# Altium PCB HP8555A_A9.PcbDoc
Units mm, origin at the board's own origin, x right, y up, seen from the top; angles counter-clockwise.
Board outline 68 x 60 mm, 2 copper layers (Top Layer, Bottom Layer), stack 0.981 mm thick; 23 components, 14 nets, 53 pads, 64 vias.
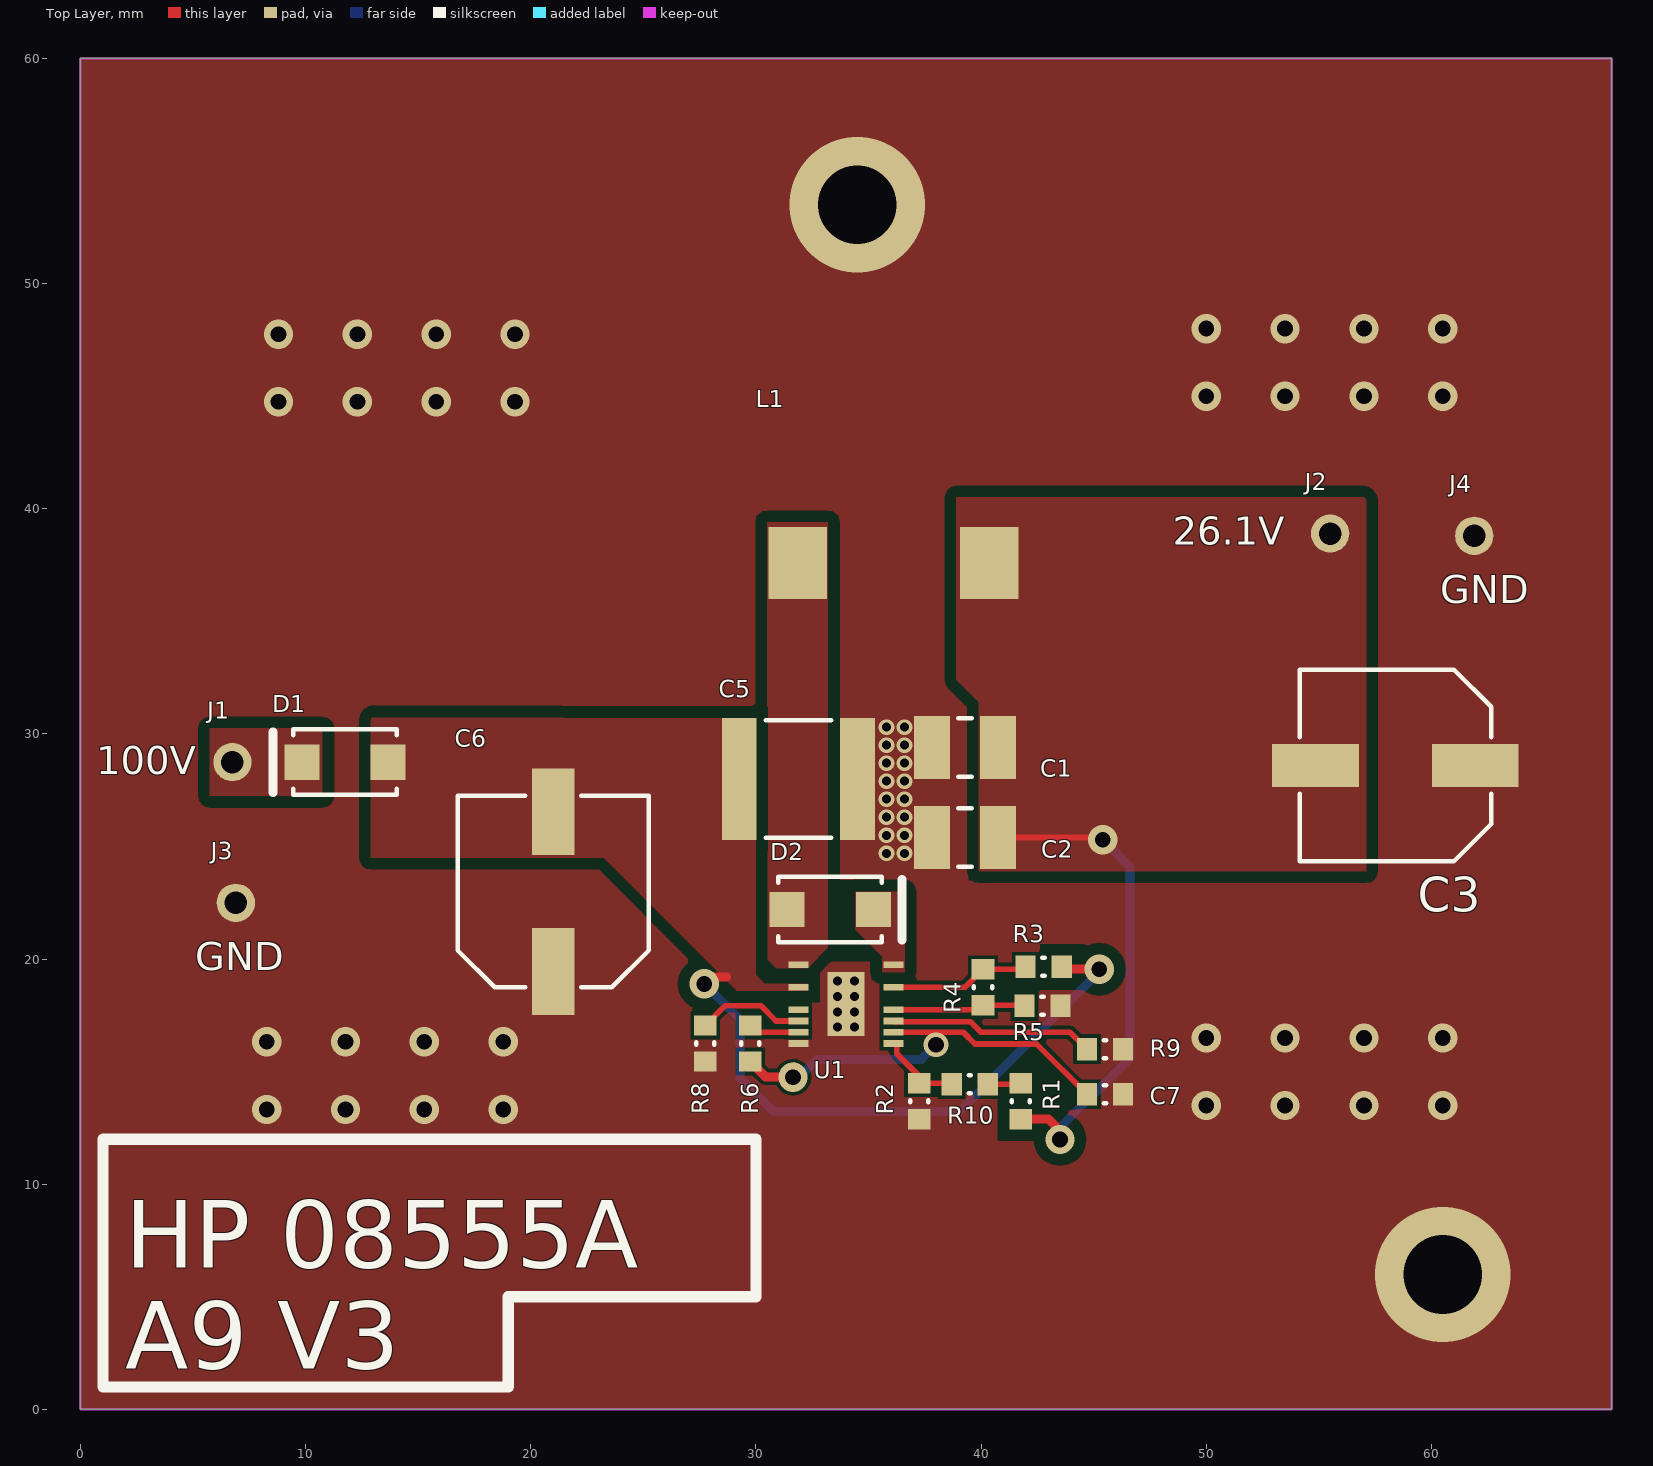
[diagram p0: Top Layer view]
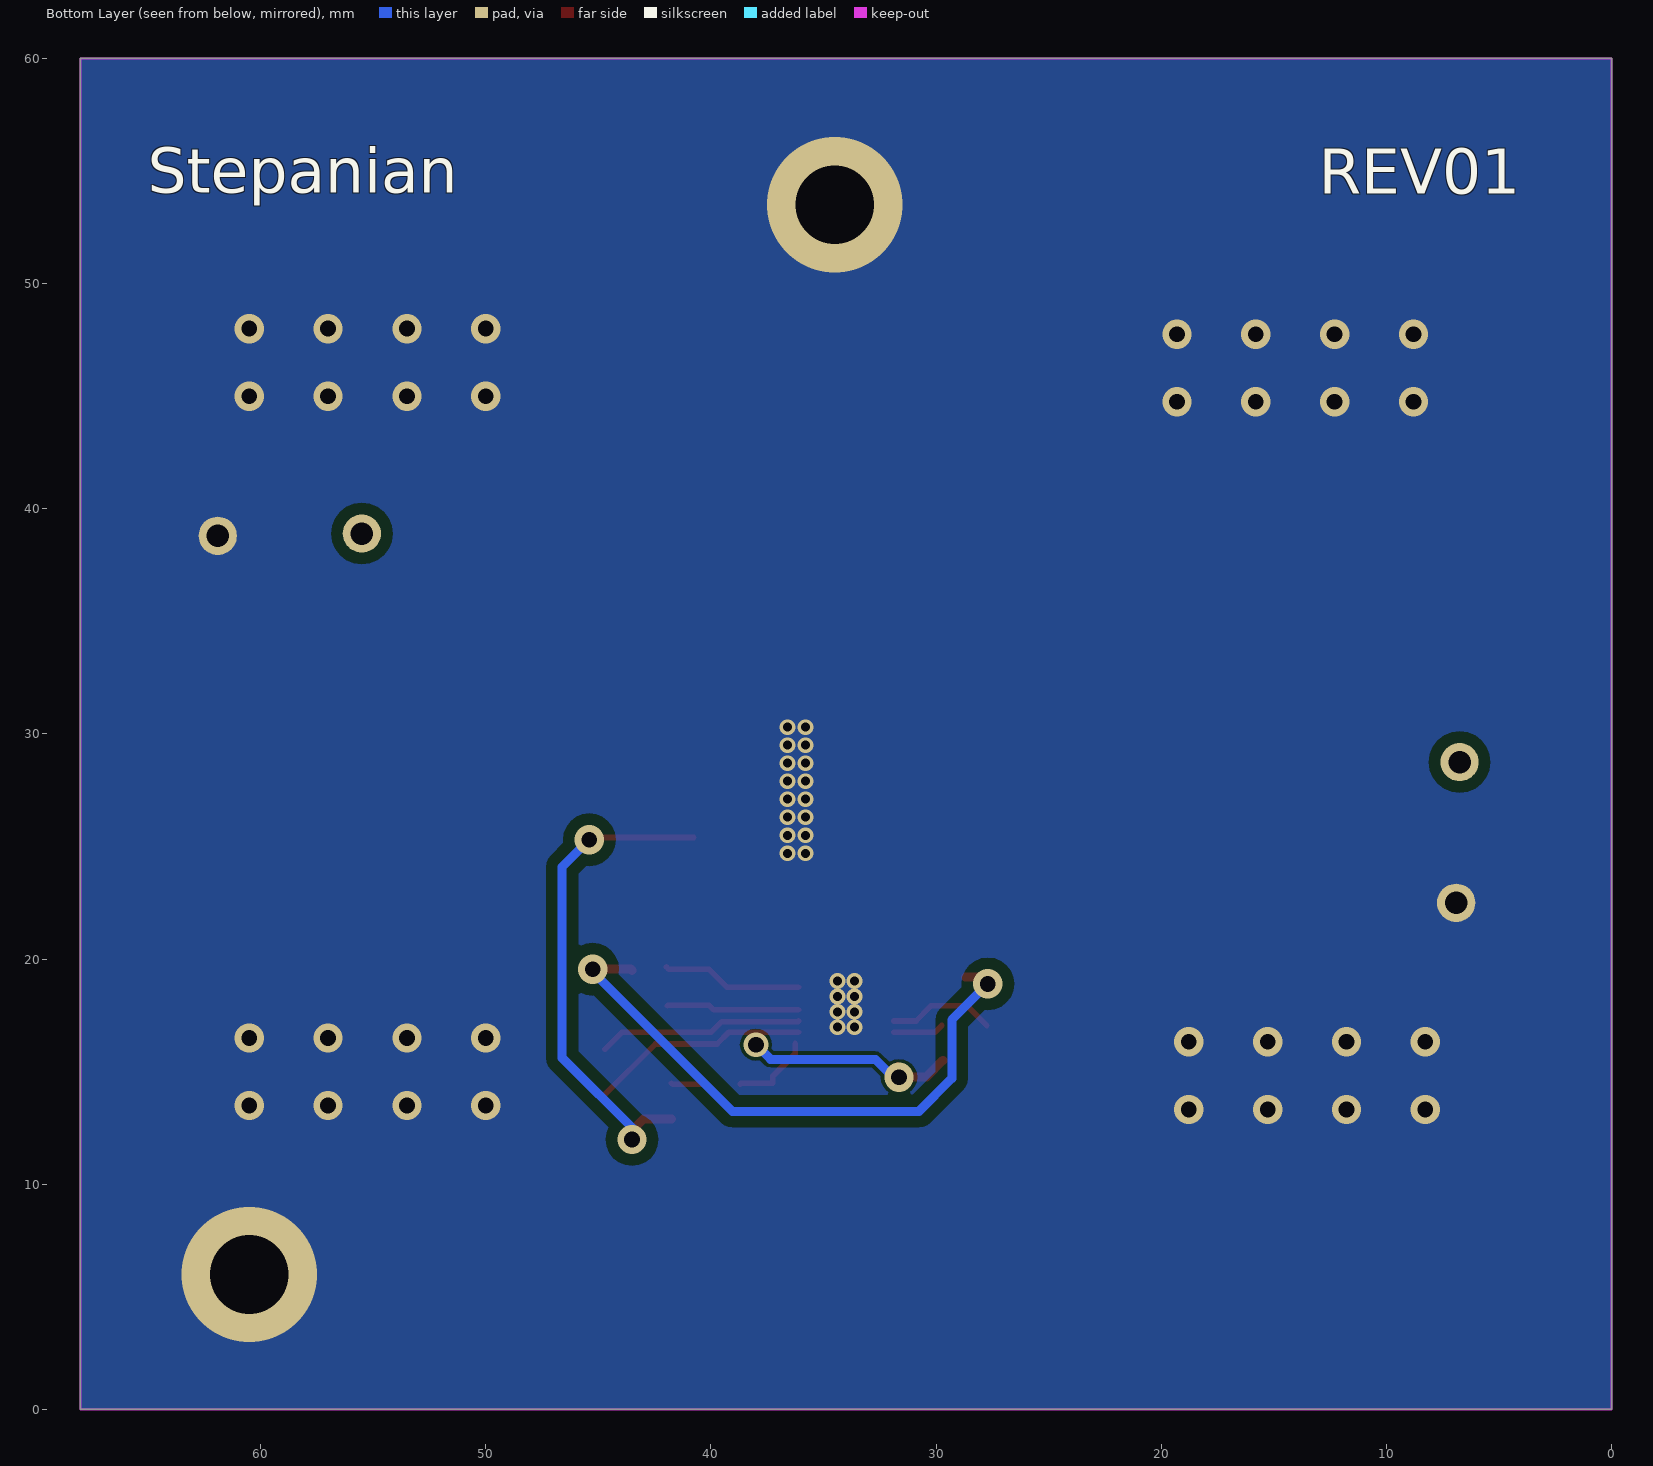
[diagram p1: Bottom Layer view, seen from below]

## Layer stack, top to bottom
Top Solder: solder mask 0.0102, Solder Resist, Dk 3.5
Top Layer: signal copper 0.0356
Dielectric 1: dielectric 0.91, FR-4, Dk 4.8
Bottom Layer: signal copper 0.0356
Bottom Solder: solder mask 0.0102, Solder Resist, Dk 3.5

## Board outline
0,0 68,0 68,60 0,60

## Design rules (kind name [scope] priority, off if disabled: settings)
Clearance Clearance_HV [InNetClass('HV')] p1: gap=0.508 ignorepadtopadclearanceinfootprint=FALSE
Clearance [All] p2: gap=0.152 ignorepadtopadclearanceinfootprint=FALSE
HoleSize [All] p1: absolutevalues=TRUE maxlimit=5 minlimit=0.3 maxpercent=80.000 minpercent=20.000
MinimumSolderMaskSliver [All] p1: minsoldermaskwidth=0.2
PlaneConnect [All] p1: planeconnectstyle=Direct reliefexpansion=0.508 reliefentries=4 reliefconductorwidth=0.254 reliefairgap=0.254
PolygonConnect [All] p1: connectstyle=Direct reliefconductorwidth=0.254 reliefentries=4 polygonreliefangle="90 Angle" airgapwidth=0.254
RoutingVias [All] p1: holewidth=0.711 width=1.27 viastyle="Through Hole" minholewidth=0.4 minwidth=0.7 maxholewidth=0.711 maxwidth=1.27
SilkToSilkClearance [All] p1 off: silktosilkclearance=0.254
SilkToSolderMaskClearance [IsPad] p1 off: minsilkscreentomaskgap=0.254 clearancetoexposedcopper=TRUE
SolderMaskExpansion [All] p1: expansion=0.15
Width [All] p1: maxlimit=0.508 minlimit=0.127 preferedwidth=0.254
25 further rules are at their usual default settings.

## Classes and differential pairs
net class HV: ANODE NetD1_2 SW VIN VOUT

## Components (designator, comment, footprint, x,y, rotation, side; value= is the part's Value field where it differs from the comment)
C1 "22u" CAP_1210_M 39.284,29.4 r0 top
C2 "OPT" CAP_1210_M 39.284,25.4 r0 top
C3 "OPT" CAP_ALU_GEN 58.4,28.6 r180 top
C5 "22u" CAP_2220_M 31.884,28 r180 top
C6 "OPT" CAP_ALU_GEN 21,23 r90 top
C7 "100n" CAP_0603_M 45.5,14 r180 top
D1 "ES1D" ES1D 11.75,28.75 r180 top
D2 "ES1D" ES1D 33.3,22.2 r0 top
J1 "Pin Header" PIN_HEADER_1POS 6.75,28.75 r0 top
J2 "Pin Header" PIN_HEADER_1POS 55.5,38.9 r0 top
J3 "Pin Header" PIN_HEADER_1POS 6.9,22.5 r0 top
J4 "Pin Header" PIN_HEADER_1POS 61.9,38.8 r0 top
L1 "470u" TDK_SLF12555T 36.105,37.6 r0 top
R1 "200K" RES_0603_M 41.75,13.69 r270 top
R2 "51K" RES_0603_M 37.25,13.69 r90 top
R3 "200K" RES_0603_M 42.776,19.653 r0 top
R4 "500R" RES_0603_M 40.084,18.75 r90 top
R5 "2.2K" RES_0603_M 42.726,17.926 r180 top
R6 "0R" RES_0603_M 29.75,16.25 r270 top
R8 "0R" RES_0603_M 27.75,16.25 r270 top
R9 "OPT" RES_0603_M 45.5,16 r180 top
R10 "13K" RES_0603_M 39.5,14.44 r0 top
U1 "LT_LTC7138" LT_LTC7138 36.105,19.75 r270 top

## Footprints (in the part's own frame and the unit in brackets; to place one, negate y for a bottom-side part, rotate by r counter-clockwise, add the part's x,y. Pads: shape width x height; smd on the part's side, far side on the other; paste and mask are expansions set on the pad)
CAP_0603_M [mm] "Chip Capacitor, Body 1.6x0.8mm, Height 1.0mm, IPC Medium Density"
  rect 0.9x1 smd: 1(-0.8,0) 2(0.8,0)
  silkscreen extent -0.05,-0.4 0.05,0.4, body extent -0.87,-0.48 0.88,0.47, height 1
CAP_1210_M [mm] "Chip Capacitor, Body 3.2x2.5mm, Height 2.2mm, IPC Low Density"
  rect 1.6x2.8 smd: 1(-1.475,0) 2(1.475,0)
  silkscreen extent -0.3,-1.3 0.3,1.3, body extent -1.7,-1.35 1.7,1.35, height 2.2
CAP_2220_M [mm] "Chip Capacitor, Body 5.7x5.0mm, Height 2.3mm, IPC Medium Density"
  rect 1.55x5.4 smd: 1(-2.625,0) 2(2.625,0)
  silkscreen extent -1.45,-2.6 1.45,2.6, body extent -3.05,-2.7 3.05,2.7, height 2.3
CAP_ALU_GEN [mm] "CAPAE, 2-Leads, Dia 8mm, Body Length 10.5mm, IPC High Density"
  rect 3.85x1.9 smd: 1(-3.55,0) 2(3.55,0)
  silkscreen extent -4.25,-4.25 4.25,4.25, body extent -5,-4.25 5,4.25, height 10.5
ES1D [mm] "Molded Diode, 2-Leads, Body 4.292x2.693mm"
  rect 1.555x1.57 smd: 1(-1.915,0) 2(1.915,0)
  silkscreen extent -2.3,-1.45 3.19,1.45, body extent -2.15,-1.35 2.15,1.35, height 2.44
LT_LTC7138 [mm] "Step down converter, 16-lead MSOP with 4 pins removed"
  rect 0.305x0.889 smd: 1(0,-4.221) 3(1,-4.221) 5(2,-4.221) 6(2.5,-4.221) 7(3,-4.221) 8(3.5,-4.221) 9(3.5,0) 10(3,0) 11(2.5,0) 12(2,0) 14(1,0) 16(0,0)
  rect 2.845x1.651 smd: 17(1.75,-2.105)
  body extent -0.25,-3.61 3.75,-0.61, height 0.86
PIN_HEADER_1POS [mm]
  round 1.7 hole 1: 1(0,0)
  body extent -1.27,-1.27 1.27,1.27, height 5.58
RES_0603_M [mm] "Chip Resistor, Body 1.6x0.8mm, IPC Medium Density"
  rect 0.9x1 smd: 1(-0.8,0) 2(0.8,0)
  silkscreen extent -0.05,-0.4 0.05,0.4, body extent -0.85,-0.47 0.85,0.47, height 0.6
TDK_SLF12555T [mm] "Inductor"
  rect 2.6x3.2 smd: 1(-4.25,0) 2(4.25,0)
  body extent -6.35,-6.35 6.35,6.35, height 5.7

## Part data
C1 C2: library part CAP_1210, "CAP Cnom Vcap Ptol Dial 1210", Category=capacitor, Created=2018-07-01, Created By=JS, Last Modified=2018-07-01
C3 C6: library part CAP_ALU_GEN, "CAP Cnom Vcap Ptol Dial", Category=capacitor, Created=2018-07-01, Created By=JS, Last Modified=2018-07-01
C5: library part CAP_2220, "CAP Cnom Vcap Ptol Dial 2220", Category=capacitor, Created=2018-07-01, Created By=JS, Last Modified=2018-07-01
C7: library part CAP_0603, "CAP 100nF Vcap Ptol Dial 0603", Category=capacitor, Created=2018-07-01, Created By=JS, Last Modified=2018-07-01
D1 D2: "DIODE 200V 1A SMA"
J1 J2 J3 J4: library part PIN_HEADER_1POS, "Pin Header 0.1\" 1pos"
L1: library part TDK_SLF12555, "IND Lind Ltol Imax Rdc"
R1: library part RES_0805, "RES OPT 1/5W 0805", Category=resistor, Created=2018-07-01, Created By=JS, Last Modified=2018-07-01
R2: library part RES_0805, "RES 51K 1/5W 0805", Category=resistor, Created=2018-07-01, Created By=JS, Last Modified=2018-07-01
R3: library part RES_0805, "RES 200K 1/5W 0805", Category=resistor, Created=2018-07-01, Created By=JS, Last Modified=2018-07-01
R4: library part RES_0805, "RES 500R 1/5W 0805", Category=resistor, Created=2018-07-01, Created By=JS, Last Modified=2018-07-01
R5: library part RES_0805, "RES 2.2K 1/5W 0805", Category=resistor, Created=2018-07-01, Created By=JS, Last Modified=2018-07-01
R6 R8: library part RES_0603, "RES 0R 1/5W 0603", Category=resistor, Created=2018-07-01, Created By=JS, Last Modified=2018-07-01
R9: library part RES_0603, "RES OPT 1/5W 0603", Category=resistor, Created=2018-07-01, Created By=JS, Last Modified=2018-07-01
R10: library part RES_0805, "RES 13K 1/5W 0805", Category=resistor, Created=2018-07-01, Created By=JS, Last Modified=2018-07-01
U1: "Step Down IC 140V 400mA", Manufacturer="Linear Technology", Manufacturer PN=LTC7138

## Via types
v1: diameter 1.3, hole 0.7, Top Layer to Bottom Layer, 37 vias
v2: diameter 0.7, hole 0.4, Top Layer to Bottom Layer, 24 vias
v3: diameter 6, hole 3.5, Top Layer to Bottom Layer, 2 vias
v4: diameter 1.1, hole 0.7, Top Layer to Bottom Layer, 1 vias

## Nets (pads, with @x,y where several pads share a name; then routed paths per layer and width w, separated by ;. In a path a pad name is that pad's centre, name@x,y a point inside that pad or via, vN(x,y) a via of type N, cw(c..) or ccw(c..) an arc to the next point about the centre after c; other vN are vias at no path point)
ANODE: D2.2 U1.16
GND: C1.1 C2.1 C3.1 C5.1 C6.1 C7.1 J3.1 J4.1 R2.1 R5.1 R8.2 R9.1 U1.8 U1.17
  other v1: 8.275,13.325 11.775,13.325 15.275,13.325 18.775,13.325 50,13.5 53.5,13.5 57,13.5 60.5,13.5 8.275,16.325 11.775,16.325 15.275,16.325 18.775,16.325 50,16.5 53.5,16.5 57,16.5 60.5,16.5 8.8,44.75 12.3,44.75 15.8,44.75 19.3,44.75 50,45 53.5,45 57,45 60.5,45 8.8,47.75 12.3,47.75 15.8,47.75 19.3,47.75 50,48 53.5,48 57,48 60.5,48
  other v2: 33.625,16.975 34.375,16.975 33.625,17.658 34.375,17.658 33.625,18.342 34.375,18.342 33.625,19.025 34.375,19.025 35.8,24.7 36.6,24.7 35.8,25.5 36.6,25.5 35.8,26.3 36.6,26.3 35.8,27.1 36.6,27.1 35.8,27.9 36.6,27.9 35.8,28.7 36.6,28.7 35.8,29.5 36.6,29.5 35.8,30.3 36.6,30.3
  other v3: 60.5,6 34.5,53.5
ISET: R9.2 U1.11 | length 9.1
  Top Layer w0.254: U1.11 36.135,17.221 39.529,17.221 40,16.75 43.95,16.75 R9.2
NetD1_2: D1.2 J1.1
NetR1_1: R1.1 R10.2 | length 1.5
  Top Layer w0.254: R10.2 41.7,14.44 R1.1
OVLO: R4.1 R5.2 U1.12 | length 5.9
  Top Layer w0.254: U1.12 39.884,17.75 R4.1 41.901,17.95 R5.2
RUN: R3.1 R4.2 U1.14 | length 6.2
  Top Layer w0.254: U1.14 39.284,18.75 R4.2 41.873,19.55 R3.1
SS: C7.2 R6.2 U1.10 | length 20.6
  Top Layer w0.254: v1@31.175,14.775 v1@31.65,15.25 ; v1(31.65,14.75) v1@31.65,15.25 ; v1@31.7,15.3 v1@31.65,15.25 ; U1.10 37.8,16.75 37.8,16.1 37.9,16 38,16.1 v4(38,16.2) ; 37.9,16.75 39.211,16.75 39.727,16.234 42.466,16.234 C7.2
  Top Layer w0.4: R6.2@29.7,15.5 30.425,14.775 v1@31.175,14.775
  Bottom Layer w0.4: v1@31.7,14.725 31.875,14.725 32.7,15.55 37.35,15.55 v4(38,16.2)
SW: D2.1 L1.1 U1.1
VFB: R2.2 R10.1 U1.9 | length 3.6
  Top Layer w0.254: U1.9@36.25,16.25 36.25,15.795 37.25,14.795 R2.2 38.65,14.49 R10.1
VIN: C5.2 C6.2 D1.1 R3.2 U1.3 | length 27
  Top Layer w0.254: v1(27.7,18.9) v1@28,19.2
  Top Layer w0.4: v1@28,19.2 28.7,19.2 ; R3.2@43.5,19.5 43.55,19.55 v1(45.25,19.55)
  Bottom Layer w0.254: v1@45,19.2 45.25,19.45 v1(45.25,19.55)
  Bottom Layer w0.4: v1(27.7,18.9) 29.3,17.3 29.3,14.7 30.758,13.242 39.042,13.242 v1@45,19.2
VOUT: C1.2 C2.2 C3.2 J2.1 L1.2 R1.2 | length 21.9
  Top Layer w0.254: C2.2 45.3,25.4 v1(45.4,25.3) ; v1@43.3,12.59 43.5,12.39 v1(43.5,11.99)
  Top Layer w0.4: R1.2 43,12.89 v1@43.3,12.59
  Bottom Layer w0.4: v1@43.3,12.3 46.608,15.608 46.608,24.092 v1(45.4,25.3)
VP1: R6.1 U1.7 | length 2.3
  Top Layer w0.254: R6.1 30.05,16.75 U1.7
VP2: R8.1 U1.6 | length 4.8
  Top Layer w0.254: R8.1 28.626,17.926 30.219,17.926 30.895,17.25 U1.6
pads on no net: U1.5

## Polygon pours and split planes (outlines as drawn)
GND on Top Layer "Top Layer-GND" (solid, pour order 22): 0,60 0,0 68,0 68,60
VOUT on Top Layer "Top Layer-VOUT" (solid, pour order 12): 39.9,23.9 39.9,31.4 38.9,32.4 38.9,40.5 57,40.5 57.1,40.4 57.1,23.9
SW on Top Layer "Top Layer-SW" (solid, pour order 16): 32.3,19.6 30.9,19.6 30.5,20 30.5,39.4 33.2,39.4 33.2,20.5
ANODE on Top Layer "Top Layer-ANODE" (solid, pour order 14): 34.4,23 36.6,23 36.6,19.4 35.6,19.4 35.6,20.1 34.4,21.3
no net on Top Layer "Top Layer-No Net" (solid, pour order 10): 40,24.05
no net on Top Layer "Top Layer-No Net 1" (solid, pour order 8): 40,24.05
no net on Top Layer "Top Layer-No Net 2" (solid, pour order 6): 32.3,19.8
VIN on Top Layer "Top Layer-VIN" (solid, pour order 2): 12.9,30.75 12.9,24.5 23.25,24.5 29.15,18.6 32.3,18.6 32.3,18.9 30.4,18.9 30,19.3 30,30.7
NetD1_2 on Top Layer "Top Layer-NetD1_2" (solid, pour order 0): 5.75,30.25 5.75,27.25 10.75,27.25 10.75,30.25
no net on Bottom Solder (solid): 38.125,21.975 38.125,32.3 32.575,32.3 32.575,16.425
no net on Bottom Solder (solid): 32.575,20.95 32.575,16.425 36.575,16.425 36.575,20.95
no net on Top Solder (solid): 35.275,30.9 35.275,24.05 37.2,24.05 37.2,30.9
no net on Top Solder (solid): 36.9,31
GND on Bottom Layer "Bottom Layer-GND" (solid, pour order 23): 0,60 68,60 68,0 0,0

## Keep-outs
Keep-Out Layer:
  the board outline again, w0.1

## Other copper
Top Layer:
  pour cut-out: 39.75,14.105 39.75,14.725 39.725,14.725 39.725,15.3 42.275,15.3 42.275,13.3 44.175,13.3 44.175,14.1 42.275,16 42.275,16.025 39.5,16.025 38.925,16.6 38.7,16.375 38.7,16 38.3,15.6 38.3,15.3 39.225,15.3 39.275,15.25 39.2,15.175 39.2,14.1
  pour cut-out: 36.9,18.2
  pour cut-out: 35.5,18.5 35.5,18 36.4,18 36.4,18.5
  pour cut-out: 33.4,23.5 34.2,23.5 34.2,20.9 35.2,19.9 33.4,19.9

## Silkscreen, mask and mechanical layers (free items; w line width, h text height)
Top Overlay:
  lines w0.5: 1,1 19,1 19,5 30,5 30,12 1,12 1,1
  text "26.1V" at 48.5,38.4 h1.25
  text "GND" at 60.4,35.8 h1.25
  text "100V" at 0.7,28.2 h1.25
  text "GND" at 5.1,19.5 h1.25
  text "HP 08555A / A9 V3" at 2,1.8 h3
Bottom Overlay:
  text "Stepanian" at 65,54.025 h2
  text "REV01" at 13,54 h2